# Altium PCB PCB-1layer.PcbDoc
Units mm, origin at the board's own origin, x right, y up, seen from the top; angles counter-clockwise.
Board outline 40 x 69.4 mm, 2 copper layers (Top Layer, Bottom Layer); 10 components, 9 nets, 39 pads, 0 vias.
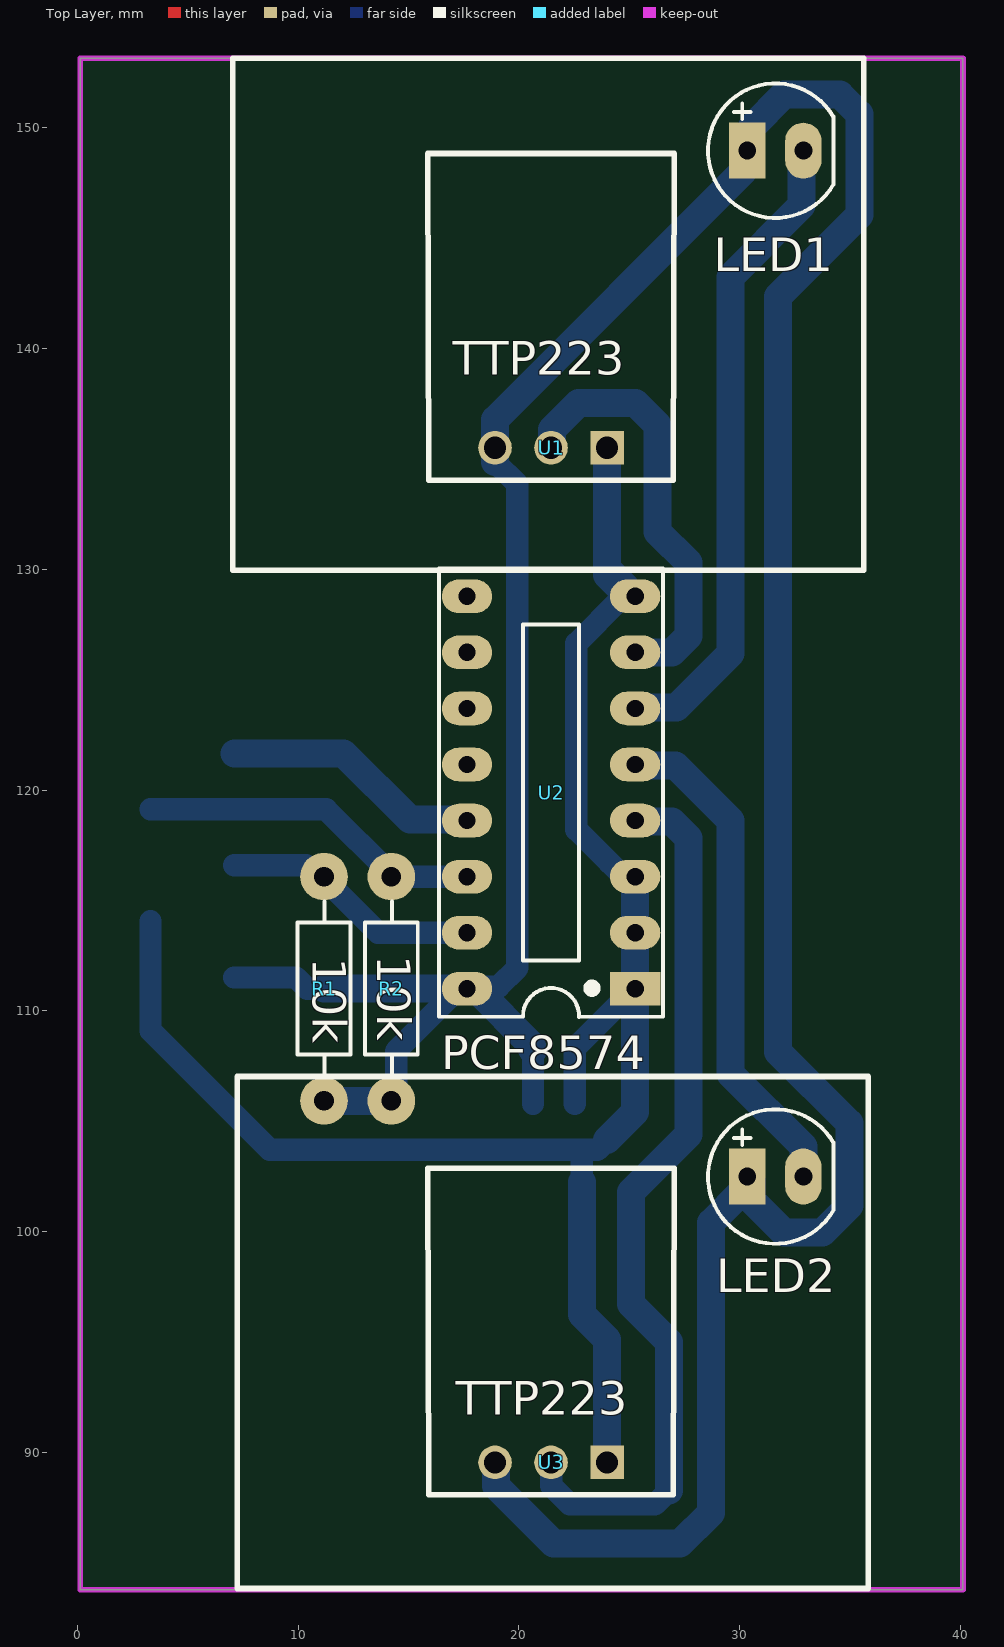
[diagram p0: Top Layer view]
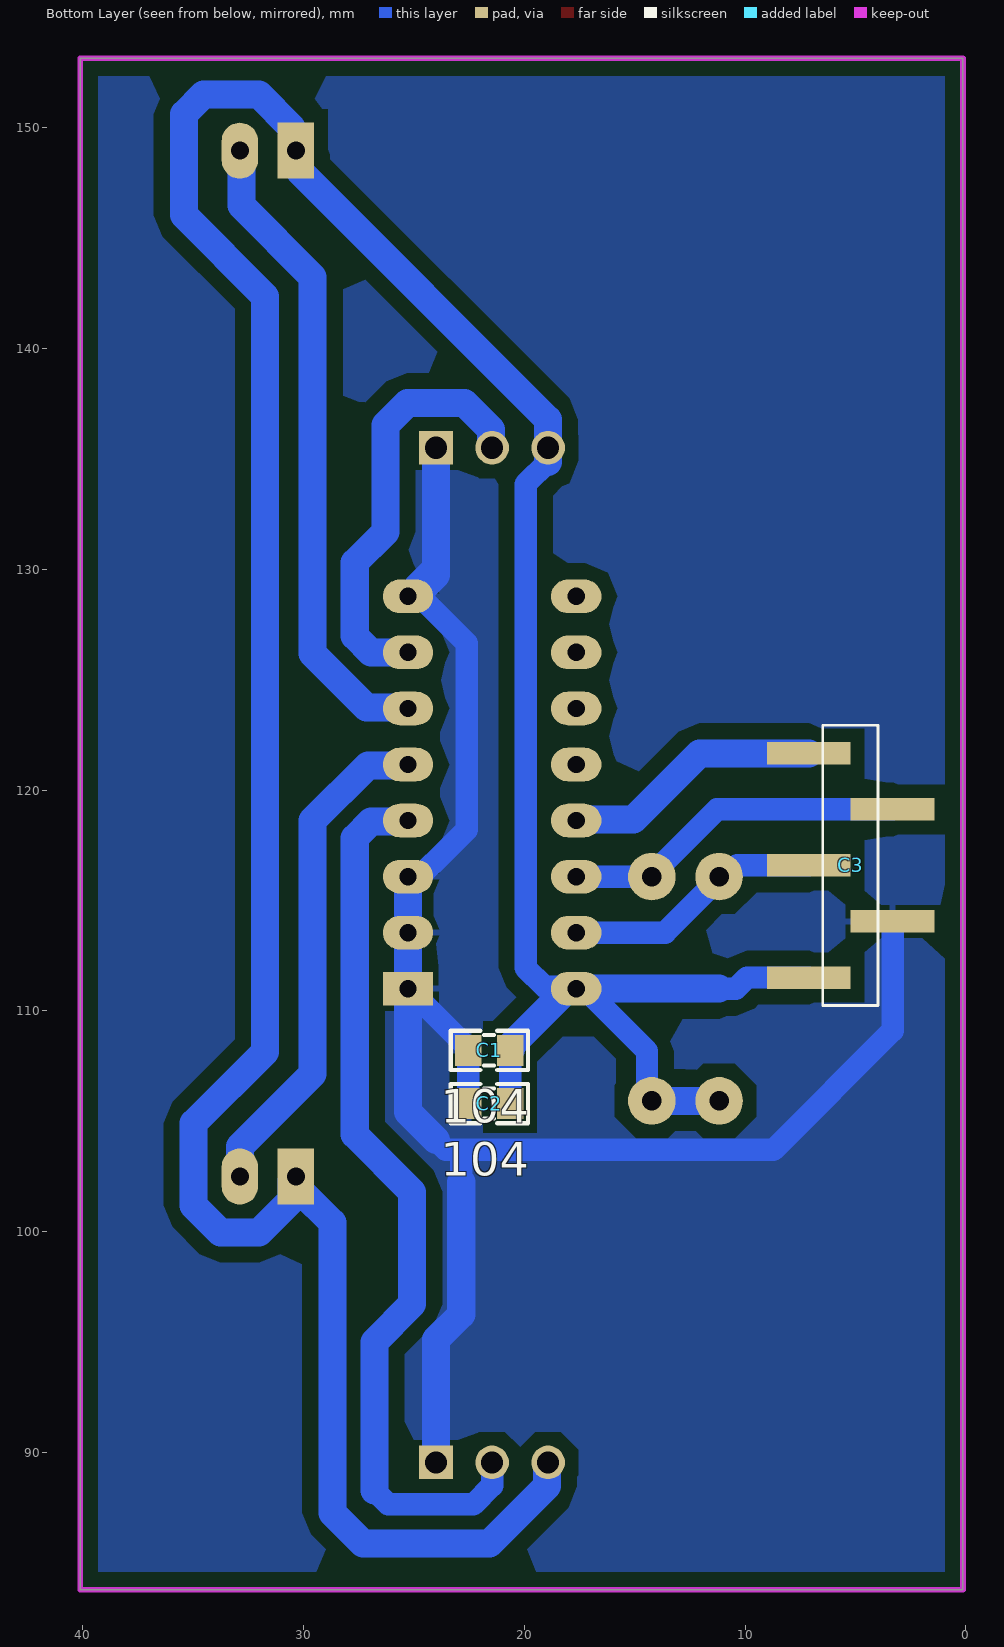
[diagram p1: Bottom Layer view, seen from below]
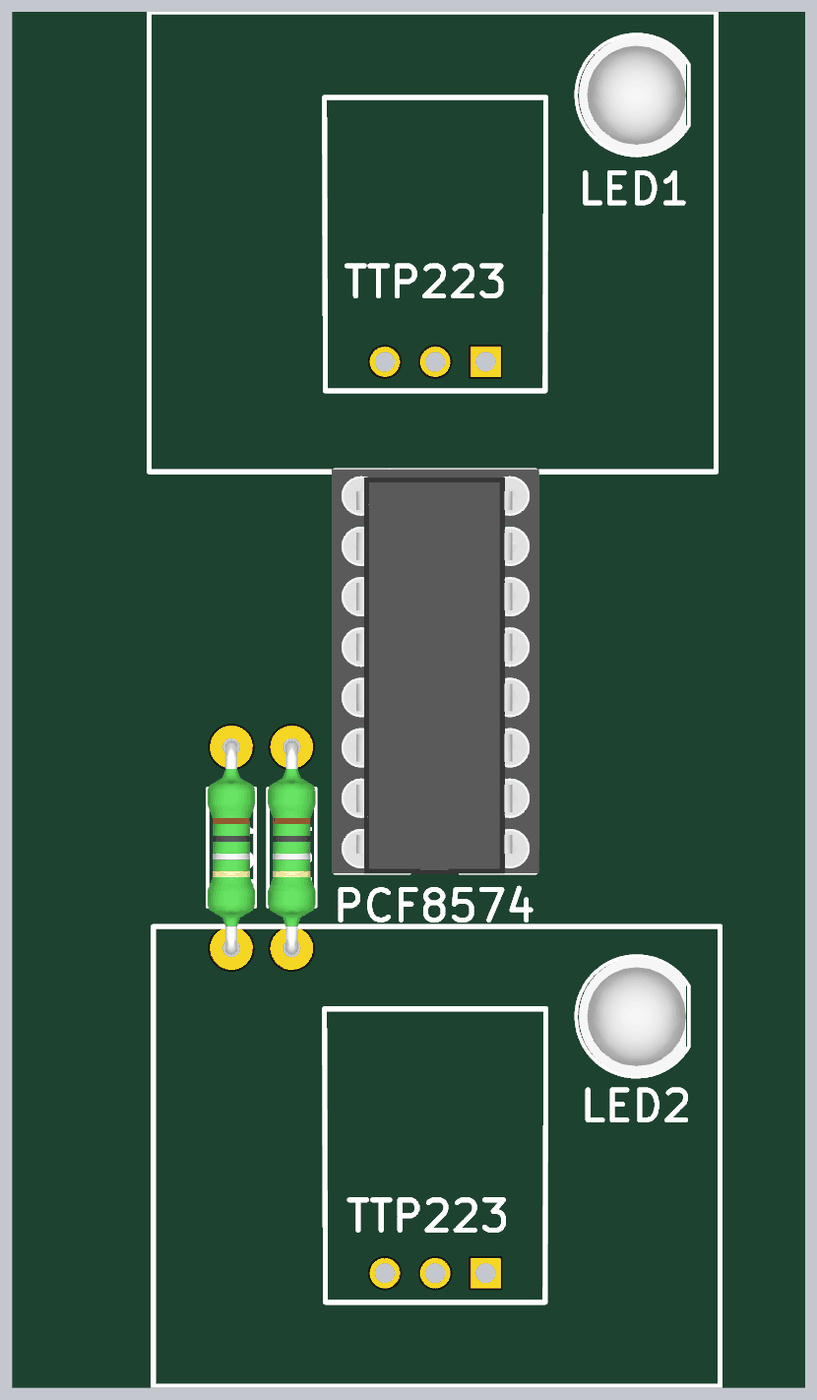
[diagram p2: 3D render of the assembled board from above, using the file's embedded part models]
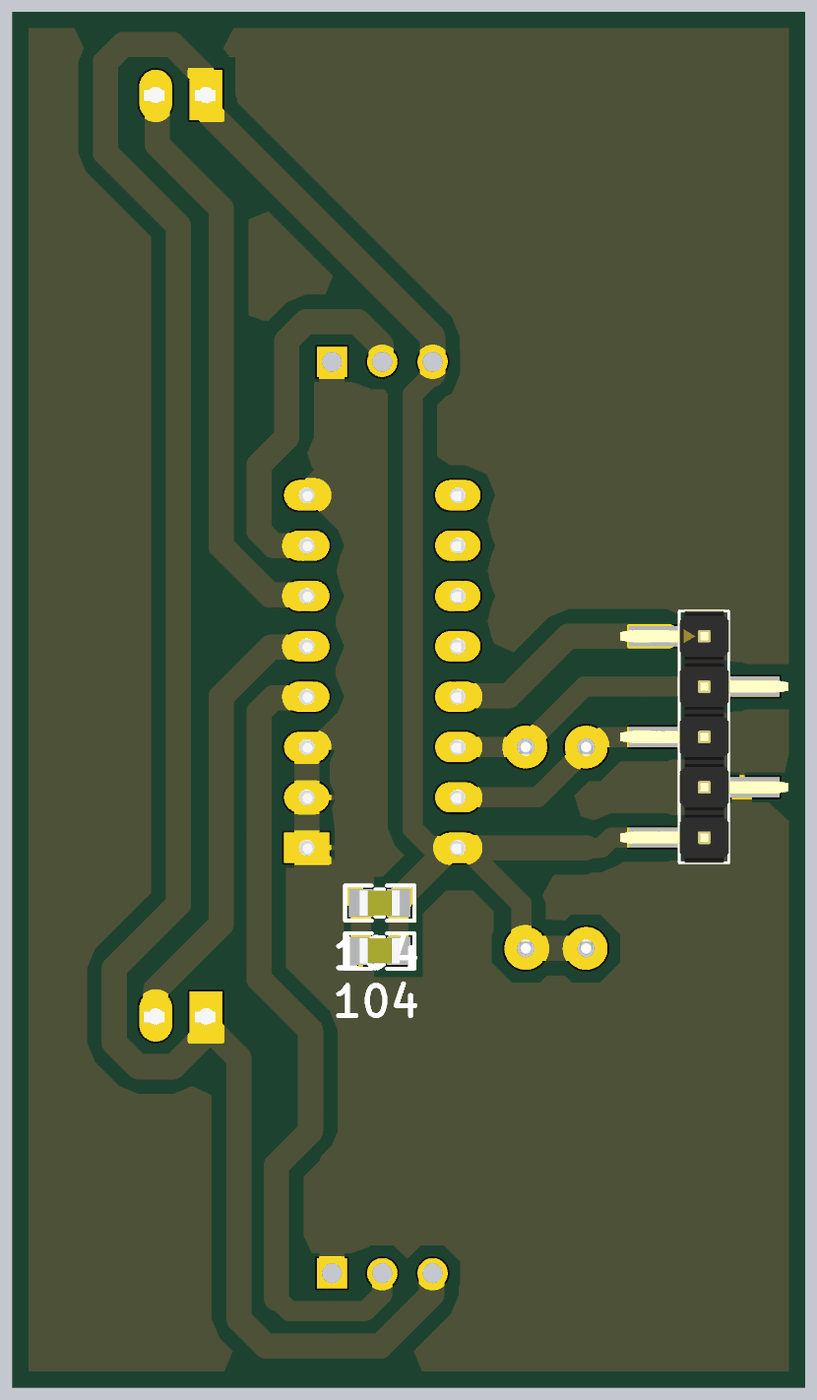
[diagram p3: 3D render of the assembled board from below, using the file's embedded part models]

## Layer stack, top to bottom
Top Solder: solder mask 0.0102, Solder Resist, Dk 3.5
Top Layer: signal copper 0.0356
Dielectric 1: dielectric 0.32, FR-4, Dk 4.8
Bottom Layer: signal copper 0.0356
Bottom Solder: solder mask 0.0102, Solder Resist, Dk 3.5

## Board outline
0.127,83.762 0.127,153.162 40.127,153.162 40.127,83.762

## Design rules (kind name [scope] priority, off if disabled: settings)
Clearance [All] p1: gap=0.635 ignorepadtopadclearanceinfootprint=FALSE
PolygonConnect [All] p1: connectstyle=Relief reliefconductorwidth=0.254 reliefentries=4 polygonreliefangle="90 Angle" airgapwidth=0.254
RoutingVias [All] p1: holewidth=0.711 width=1.27 viastyle="Through Hole" minholewidth=0.711 minwidth=1.27 maxholewidth=0.711 maxwidth=1.27
SolderMaskExpansion [All] p1: expansion=0.102 istentingtop=FALSE
SupplyNets "Schematic Supply Nets_1" [InNet('+3.3')] p1: voltage=0.000
SupplyNets "Schematic Supply Nets" [InNet('GND')] p2: voltage=0.000
Width [All] p1: maxlimit=1.27 minlimit=1.016 preferedwidth=1.27
30 further rules are at their usual default settings.

## Components (designator, comment, footprint, x,y, rotation, side; value= is the part's Value field where it differs from the comment)
C1 "104" "tu 0805" 21.59,108.204 r0 bottom
C2 "104" "tu 0805" 21.59,105.791 r0 bottom
C3 "JP5" JP5-SMD-2.54 5.212,121.666 r270 bottom
LED1 "LED" LED-5-RED 30.353,148.971 r0 top value="LED 3 ly Single Colour"
LED2 "LED" LED-5-RED 30.353,102.489 r0 top value="LED 3 ly Single Colour"
R1 "10k" RES-1/4W 11.303,111.379 r90 top
R2 "10k" RES-1/4W 14.351,111.379 r90 top
U1 "TTP223" "Module TTP223" 21.463,135.509 r0 top
U2 "PCF8574" DIP16 25.273,128.905 r180 top
U3 "TTP223" "Module TTP223" 21.463,89.535 r0 top

## Footprints (in the part's own frame and the unit in brackets; to place one, negate y for a bottom-side part, rotate by r counter-clockwise, add the part's x,y. Pads: shape width x height; smd on the part's side, far side on the other; paste and mask are expansions set on the pad)
DIP16 [mil] "16 PIN, W 300mil, Pin to pin 100mil"
  rect 90x60 hole 31: 1(0,705)
  oval 90x60 hole 31: 2(0,605) 3(0,505) 4(0,405) 5(0,305) 6(0,205) 7(0,105) 8(0,5) 9(300,5) 10(300,105) 11(300,205) 12(300,305) 13(300,405) 14(300,505) 15(300,605) 16(300,705)
  silkscreen extent -50,-45 350,755, body extent -57,-47 356,757, height 299
JP5-SMD-2.54 [mm]
  rect 1.02x3.8 smd: 1(0,-1.9) 2(2.54,1.9) 3(5.08,-1.9) 4(7.62,1.9) 5(10.16,-1.9)
  silkscreen extent -1.27,-1.27 11.43,1.23, body extent -1.27,-4.25 11.43,4.25, height 10.3
LED-5-RED [mil] "LED 2 PIN, 5 ly , Only colour,pin to pin 100mil"
  rect 65x100 hole 32: 1(0,0)
  oval 65x100 hole 32: 2(100,0)
  silkscreen extent -70,-120 154,120, body extent -65,-119 149,118, height 339
"Module TTP223" [mil]
  rect 60x60 hole 39.37: 1(100,0)
  round 60 hole 39.37: 2(0,0) 3(-100,0)
  silkscreen extent -220,-58 220,525, body extent -207,-45 207,525, height 39
RES-1/4W [mil]
  round 85 hole 35: 1(-215,5) 2(185,5)
  silkscreen extent -173,-42 141,52, body extent -227,-42 197,52, height 95
"tu 0805" [mm] "Compoment SMD 80x50mil"
  rect 1.2x1.4 smd: 1(-0.946,-0.003) 2(0.954,-0.003)
  silkscreen extent -1.75,-0.89 1.75,0.89, body extent -1.01,-0.64 1.01,0.63, height 0.61

## Part data
C1 C2: library part "Tu 0805 104 50V 10%", "Dán", Chung_Loai=Dán, Don_Vi=Con, Ma_Hang=MH004551, So_Chan=2, Ten_Linh_Kien="Tụ 0805 104-100nF 10% 50V"
C3: "WR-PHD 2.54 mm Angled Socket Header", Manufacturer="W¨¹rth Elektronik eiSos GmbH", partNo=613005143121, ComponentLink1 Description=Manufacturer, ComponentLink1URL=http://www.we-online.com, ComponentLink2 Description=Datasheet, ComponentLink2URL=http://katalog.we-online.de/em/datasheet/6130xx143121.pdf, Created by="Karrer Zheng", Created Date="29 March 2013", NoPins=05
LED1 LED2: "LED Single colour Green and Red"
R1 R2: library part Res, "Res", Manufacturer="Generic Components", Class=Passive, Published=08/06/2000, Publisher="Altium Hobart Technology Centre", SubClass=R
U1 U3: library part "Module TTP223"

## Nets (pads, with @x,y where several pads share a name; then routed paths per layer and width w, separated by ;. In a path a pad name is that pad's centre, name@x,y a point inside that pad or via, vN(x,y) a via of type N, cw(c..) or ccw(c..) an arc to the next point about the centre after c; other vN are vias at no path point)
+3.3: C1.1 C2.1 C3.5 LED1.1 LED2.1 R1.1 R2.1 U1.3 U2.16 U3.3 | length 164.6
  Bottom Layer w1.016: C3.5 9.906,111.506 10.414,110.998 11.176,110.998 ; R2.1 14.443,106.137 14.443,108.169 17.272,110.998 U2.16 17.75,111.095 19.09,111.095 19.939,111.944 19.939,133.858 U1.3@18.923,134.874 ; C2.1 C1.1
  Bottom Layer w1.27: R1.1 R2.1 ; 11.176,110.998 U2.16 18.034,110.998 20.609,108.423 20.609,108.242 C1.1 ; U3.3 18.972,89.486 18.972,88.456 21.576,85.852 27.305,85.852 28.702,87.249 28.702,100.393 LED2.1@30.141,101.833 ; U1.3@18.923,134.874 U1.3 18.923,136.779 30.162,148.018 30.162,148.78 LED1.1 ; LED2.1 30.543,102.298 30.543,101.431 32.025,99.949 33.761,99.949 34.989,101.177 34.989,104.902 31.75,108.14 31.75,142.367 35.433,146.05 35.433,150.622 34.544,151.511 32.025,151.511 LED1.1@30.543,150.029
GND: C1.2 C2.2 C3.4 U1.1 U2.1 U2.2 U2.3 U2.8 U3.1 | length 86.4
  Bottom Layer w1.016: C3.4 3.312,109.103 8.72,103.695 22.86,103.695 ; C2.2 C1.2 22.544,108.307 24.638,110.401 24.638,110.744 24.892,110.998 U2.1 ; 22.86,102.235 22.86,103.695 ; 24.003,104.14 23.558,103.695 22.86,103.695 ; U2.3 24.755,116.078 24.12,116.713 24.103,116.713 22.606,118.21 22.606,126.646 24.641,128.681 25.176,128.681 U2.8
  Bottom Layer w1.27: 22.86,102.235 22.86,96.239 24.003,95.096 U3.1 ; 24.003,104.14 25.273,105.41 U2.1 U2.2 U2.3 ; 24.003,130.048 24.843,129.208 24.843,128.895 U2.8@24.961,128.778 ; U1.1 24.003,129.736 U2.8@24.961,128.778 ; U2.8 U2.8@24.961,128.778
I1: U1.2 U2.7 | length 19.4
  Bottom Layer w1.27: U1.2 21.512,135.558 21.512,136.338 22.715,137.541 25.291,137.541 26.289,136.543 26.289,131.699 27.686,130.302 27.686,126.982 26.942,126.238 U2.7
I2: U2.4 U3.2 | length 41.1
  Bottom Layer w1.016: U3.2 21.463,88.479 22.312,87.63 26.162,87.63 26.797,88.265
  Bottom Layer w1.27: U2.4 25.322,118.569 26.942,118.569 27.686,117.825 27.686,104.394 25.082,101.79 25.082,96.711 26.797,94.996 26.797,88.265
INT: C3.1 U2.13 | length 12.2
  Bottom Layer w1.016: C3.1 C3.1@7.493,121.666
  Bottom Layer w1.27: C3.1 12.065,121.666 15.064,118.667 17.604,118.667 U2.13
L1: LED1.2 U2.6 | length 29.8
  Bottom Layer w1.27: U2.6 25.322,123.747 27.145,123.747 29.591,126.193 29.591,143.256 32.82,146.485 LED1.2@32.82,149.279
L2: LED2.2 U2.5 | length 22.9
  Bottom Layer w1.27: U2.5 25.322,121.109 27.096,121.109 29.591,118.615 29.591,107.143 32.893,103.841 LED2.2
SCL: C3.2 R2.2 U2.14 | length 15.7
  Bottom Layer w1.016: C3.2 11.271,119.126 14.224,116.173 R2.2 U2.14
SDA: C3.3 R1.2 U2.15 | length 11.9
  Bottom Layer w1.016: C3.3 10.359,116.586 10.867,116.078 R1.2 11.176,115.983 13.621,113.538 U2.15
pads on no net: U2.9 U2.10 U2.11 U2.12

## Polygon pours and split planes (outlines as drawn)
GND on Bottom Layer "GND_L02_P000" (solid, pour order 0): 0.127,153.035 0.254,153.162 40.132,153.162 40.132,83.82 0.127,83.82 0.127,153.162

## Keep-outs
Keep-Out Layer:
  the board outline again, w0.254

## Silkscreen, mask and mechanical layers (free items; w line width, h text height)
Top Overlay:
  lines w0.254: 7.036,129.962 35.636,129.962 35.636,153.162 7.036,153.162 7.036,129.962 ; 7.239,83.82 35.839,83.82 35.839,107.02 7.239,107.02 7.239,83.82